# Altium PCB Asfaloth_L2_AVI_ver1.1.PcbDoc (part 1 of 2)
Units mil, origin at the board's own origin, x right, y up, seen from the top; angles counter-clockwise.
Board outline 4135 x 4330.71 mil, 2 copper layers (Top Layer, Bottom Layer); 82 components, 201 nets, 508 pads, 1168 vias.
Unrouted connection lines stored in the file: 2.
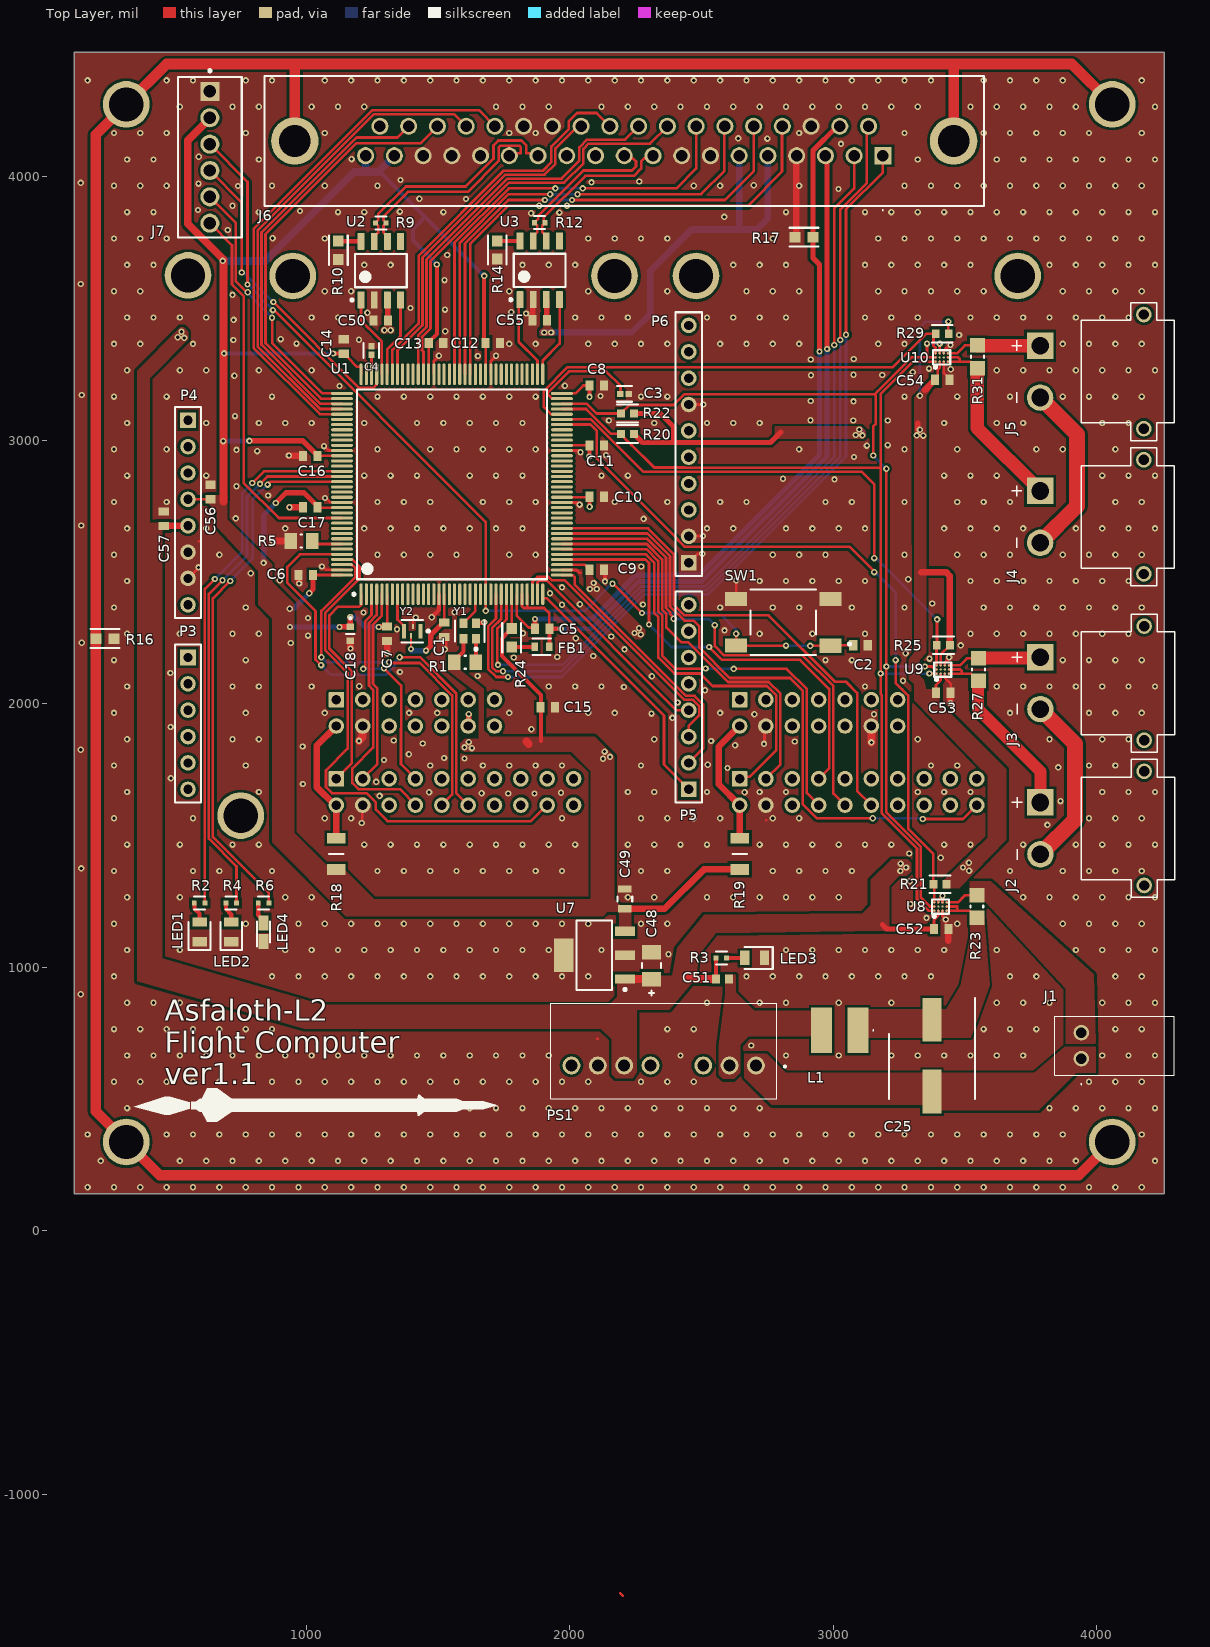
[diagram p0: Top Layer view]
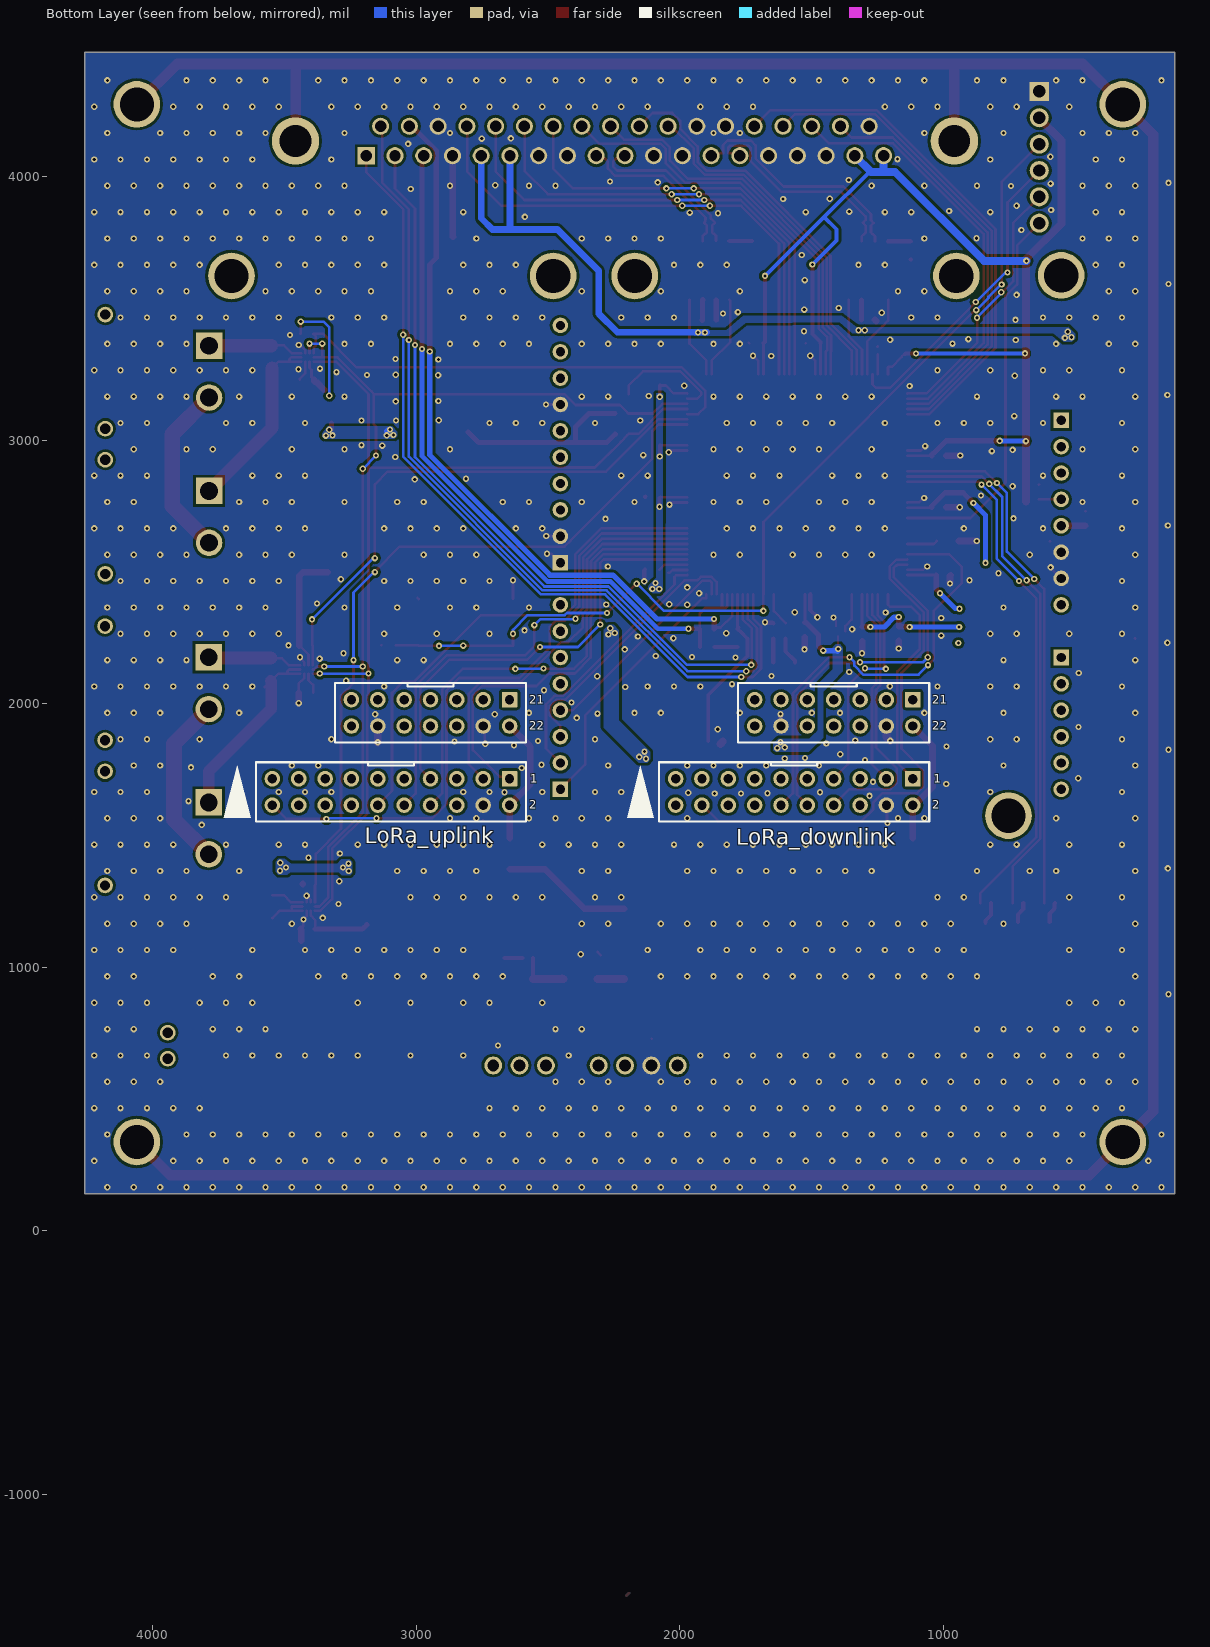
[diagram p1: Bottom Layer view, seen from below]
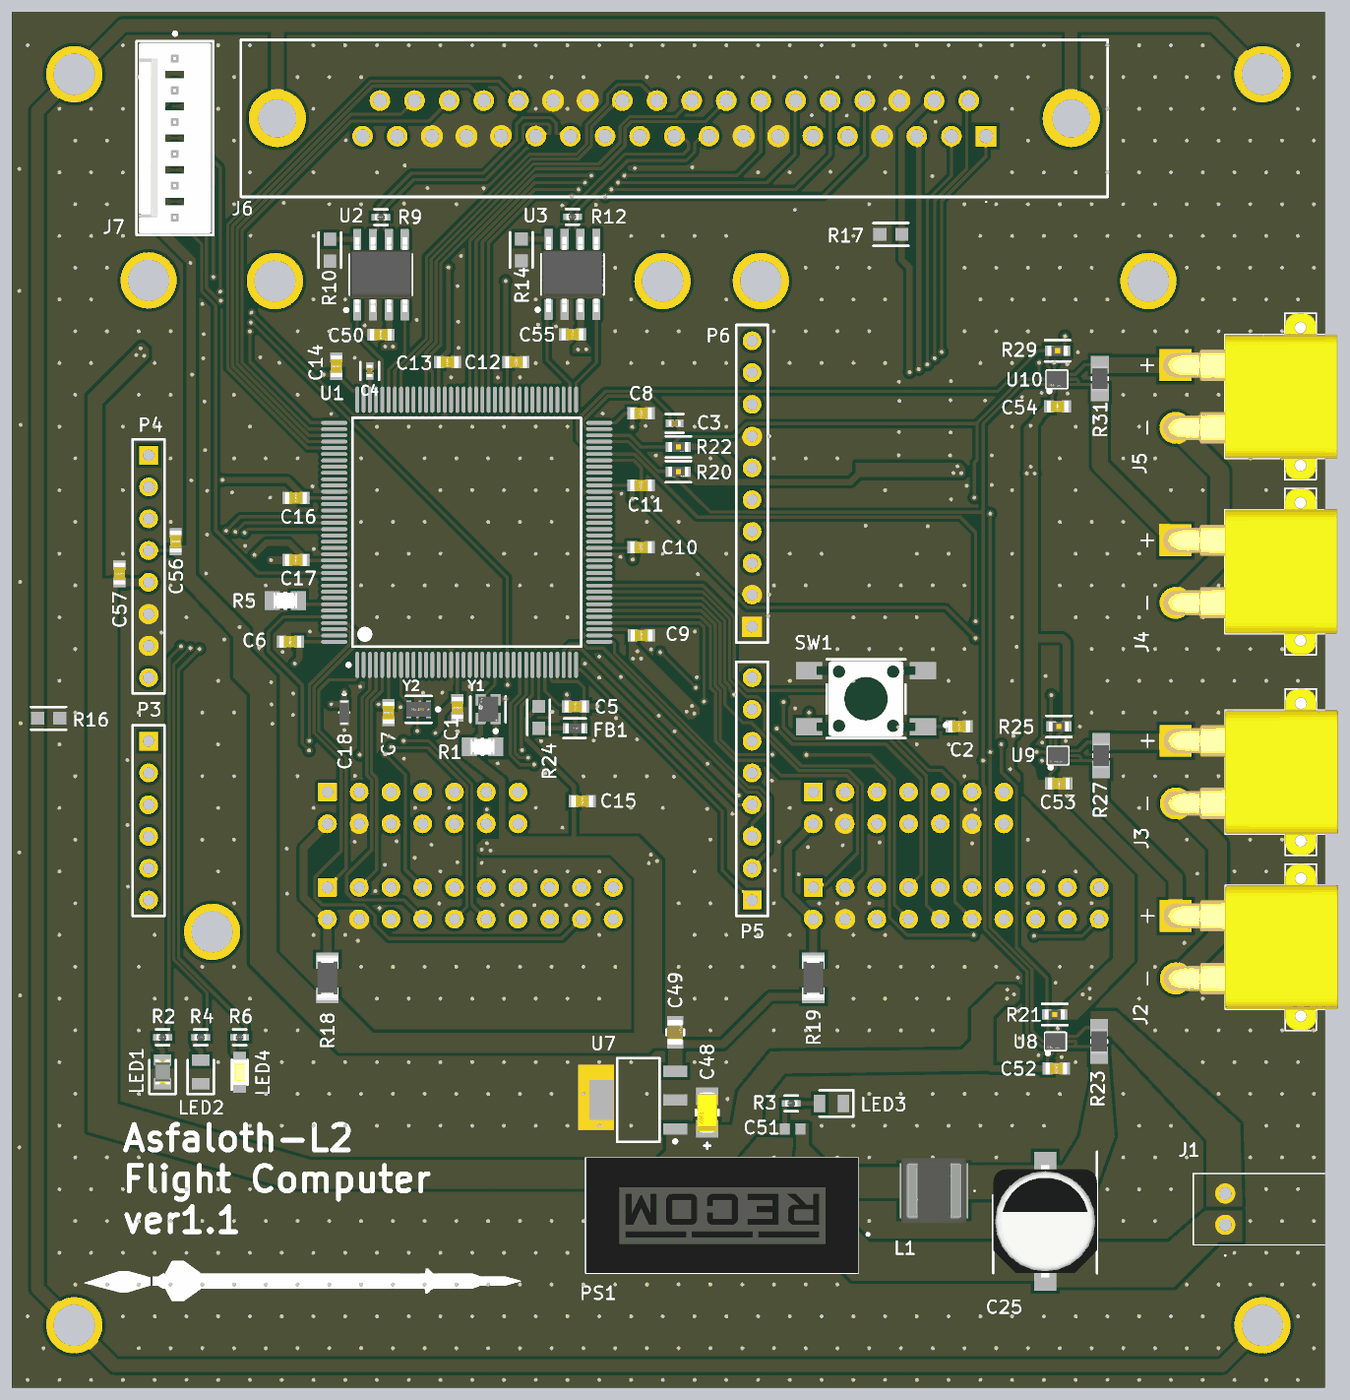
[diagram p3: 3D render of the assembled board from above, using the file's embedded part models]

## Layer stack, top to bottom
Top Solder: solder mask 0.4, Solder Resist, Dk 3.5
Top Layer: signal copper 1.4
Dielectric 1: dielectric 12.6, FR-4, Dk 4.8
Bottom Layer: signal copper 1.4
Bottom Solder: solder mask 0.4, Solder Resist, Dk 3.5

## Board outline
121,140 121,4470.71 4256,4470.71 4256,140

## Design rules (kind name [scope] priority, off if disabled: settings)
Clearance [All] p1: gap=5 ignorepadtopadclearanceinfootprint=FALSE except(10: Arc-Fill Arc-Poly Arc-Region Track-Fill Track-Poly Track-Region SMDPad-Fill SMDPad-Poly SMDPad-Region THPad-Fill THPad-Poly THPad-Region Via-Fill Via-Poly Via-Region Fill-Fill Fill-Poly Fill-Region Poly-Poly Poly-Region Region-Region)
DiffPairsRouting [All] p1: maxlimit=10 minlimit=10 mostfreqgap=10 toplayer_minwidth=10 toplayer_maxwidth=15 toplayer_prefwidth=15 bottomlayer_minwidth=10 bottomlayer_maxwidth=15 bottomlayer_prefwidth=15 maxuncoupledlength=500
PlaneClearance [All] p1: clearance=8
PlaneConnect [All] p1: planeconnectstyle=Direct reliefexpansion=20 reliefentries=4 reliefconductorwidth=10 reliefairgap=10
PolygonConnect PolygonConnect_1 [All vs InNetClass('PWR')] p1: connectstyle=Direct reliefconductorwidth=10 reliefentries=4 polygonreliefangle="90 Angle" airgapwidth=10
PolygonConnect [All] p2: thpad.connectstyle=Relief thpad.reliefconductorwidth=10 thpad.reliefentries=4 thpad.polygonreliefangle="90 Angle" thpad.airgapwidth=10 smdpad.connectstyle=Direct smdpad.reliefconductorwidth=10 smdpad.reliefentries=4 smdpad.polygonreliefangle="90 Angle" smdpad.airgapwidth=10 via.connectstyle=Direct via.reliefconductorwidth=10 via.reliefentries=4 via.polygonreliefangle="90 Angle" via.airgapwidth=10
RoutingVias [All] p1: holewidth=12 width=24 viastyle="Through Hole" minholewidth=12 minwidth=24 maxholewidth=12 maxwidth=24
SolderMaskExpansion Via [All] p1: expansion=4 istentingtop=TRUE useseparateexpansions=TRUE expansionbottom=4 istentingbottom=TRUE
Width PWR [InNetClass('PWR')] p1: maxlimit=60 minlimit=8 preferedwidth=15 minimp=50.000000 maximp=50.000000 favimp=50.000000
Width [All] p2: maxlimit=16 minlimit=6 preferedwidth=10
27 further rules are at their usual default settings.

## Classes and differential pairs
net class PWR: 3V3_VCC 5V_VCC 7V4_GND 7V4_VCC 14V8_GND 14V8_VCC 25V9_GND 25V9_VCC AGND AVDD Chassis_GND GND IN-_PM1 IN-_PM2 IN-_PM3 VDD_ANA VDD_FEM VDD_RFS VIN_DCDC
component class U_LoRa_uplink: LoRa_uplink
component class U_LoRa_downlink: LoRa_downlink
channel class SX1276_e268v01a: U_LoRa_downlink U_LoRa_uplink
differential pair CAN_Motor: +CAN_Motor_P -CAN_Motor_N
differential pair CAN_EGSE: +CAN_EGSE_P -CAN_EGSE_N

## Components (designator, comment, footprint, x,y, rotation, side; value= is the part's Value field where it differs from the comment)
C1 "0.1uF" CAPC1608X87N#1 1524.44,2280 r270 top
C2 "0.1uF" CAPC1608X87N#2 3103.87,2221.58 r0 top
C3 "2.2uF" FP-GRT155-0_2-IPC_C 2208.2,3175 r0 top
C4 "2.2uF" FP-GRT155-0_2-IPC_C 1248,3340 r90 top
C5 "0.1uF" CAPC1608X87N#1 1896,2284 r180 top
C6 "0.1uF" CAPC1608X87N#3 998.44,2487.83 r180 top
C7 "0.1uF" CAPC1608X87N#1 1307.44,2265 r270 top
C8 "0.1uF" CAPC1608X87N#3 2102.44,3207 r0 top
C9 "0.1uF" CAPC1608X87N#1 2103.44,2508 r0 top
C10 "0.1uF" CAPC1608X87N#1 2102.44,2785 r0 top
C11 "0.1uF" CAPC1608X87N#1 2102.44,2980 r0 top
C12 "0.1uF" CAPC1608X87N#3 1708.56,3368 r0 top
C13 "0.1uF" CAPC1608X87N#3 1493,3368 r0 top
C14 "0.1uF" CAPC1608X87N#3 1143,3355 r90 top
C15 "0.1uF" CAPC1608X87N#1 1917,1986 r0 top
C16 "0.1uF" CAPC1608X87N#3 1015.88,2940 r180 top
C17 "0.1uF" CAPC1608X87N#3 1015.88,2745 r180 top
C18 "4.7uF" GRT188 1168,2265 r270 top
C25 "10uF" CAPAE830X650N 3375,664.17 r270 top locked
C48 "4.7uF" FP-TAJA-MFG 2310.86,1006.18 r270 top
C49 "1uF" FP-GCM21B-0_15-MFG 2210,1258.94 r90 top
C50 "0.1uF" CAPC1608X87N#3 1283.56,3454 r180 top
C51 "220pF" CAPC1608X87X35LL15T15 2580,955 r180 top
C52 "0.1uF" CAPC1608X87N#3 3410,1145 r0 top
C53 "0.1uF" CAPC1608X87N#3 3418,2041.43 r0 top
C54 "0.1uF" CAPC1608X87N#3 3414,3228.64 r0 top
C55 "0.1uF" CAPC1608X87N#3 1886.56,3455 r180 top
C56 "0.1uF" CAPC1608X87N#3 637,2803 r90 top
C57 "0.1uF" CAPC1608X87N#3 460,2702 r90 top
FB1 "300Ohm 0.5A" FP-MMZ1608-0_8-MFG 1895,2215.48 r180 top
J1 "53426-0210" 534260210 3942,653 r90 top locked
J2 "XT30PW-M" AMASS_XT30PW-M 4180,1526.54 r270 top locked
J3 "XT30PW-M" AMASS_XT30PW-M 4180,2077.72 r270 top
J4 "XT30PW-M" AMASS_XT30PW-M 4179,2708.64 r270 top
J5 "XT30PW-M" AMASS_XT30PW-M 4179,3259.82 r270 top locked
J6 "L717SDCH37POL2" L717SDCH37POL2 3188.77,4079 r180 top locked
J7 "22-27-2061" FP-22-27-2061-MFG 635,4073 r270 top locked
L1 "47uH" SRR5228A 3025,760 r270 top
LED1 "LED_R" LEDC2012X80N 596,1134 r90 top
LED2 "LED_G" LEDC2012X90N 716,1134 r90 top
LED3 "LED_G" LEDC2012X90N 2702,1035 r180 top
LED4 "LED_B" LEDM2012X100N 838.65,1133.02 r90 top
LoRa_downlink "SM12xx Header" "HDR34 Header" 1115,1715 r0 bottom locked (schematic designator LoRa_uplink)
LoRa_uplink "SM12xx Header" "HDR34 Header" 2645,1715 r0 bottom locked
P3 "Header 6" HDR1X6 552,2175 r270 top locked
P4 "Header 8" HDR1X8 552,3075 r270 top locked
P5 "Header 8" HDR1X8 2452,1675 r90 top locked
P6 "Header 10" HDR1X10 2452,2535 r90 top locked
PS1 "RS6-0505S" RS60505S 2707,627 r180 top locked
R1 "10kOhm" FP-CRCW0805-e3-IPC_A 1603.31,2157 r180 top
R2 "120Ohm" FP-ERJ2RK-MFG 596,1243.02 r180 top
R3 "120Ohm" FP-ERJ2RK-MFG 2575.57,1035 r0 top
R4 "120Ohm" FP-ERJ2RK-MFG 716,1243.02 r180 top
R5 "10kOhm" FP-CRCW0805-e3-IPC_A 982.44,2617 r180 top
R6 "120Ohm" FP-ERJ2RK-MFG 838.65,1243.02 r180 top
R9 "120Ohm" FP-ERJ2RK-MFG 1283.56,3824 r0 top
R10 "0Ohm" FP-AC0603-0_55-IPC_A 1122.56,3720 r90 top
R12 "120Ohm" FP-ERJ2RK-MFG 1886.56,3825 r0 top
R14 "0Ohm" FP-AC0603-0_55-IPC_A 1725.56,3721 r90 top
R16 "0Ohm" FP-AC0603-0_55-IPC_A 237,2247 r0 top
R17 "0Ohm" FP-AC0603-0_55-IPC_A 2889,3770 r0 top
R18 "0Ohm" RESC3216X60N 1115,1430 r90 top
R19 "0Ohm" RESC3216X60N 2645,1430 r90 top
R20 "4.7kOhm" FP-KTR03-IPC_C 2220,3023 r0 top
R21 "4.7kOhm" FP-KTR03-IPC_C 3405,1315 r180 top
R22 "4.7kOhm" FP-KTR03-IPC_C 2220.13,3101 r0 top
R23 "10mOhm shunt" CSS0805FT10L0 3545,1230 r270 top
R24 "0Ohm" FP-AC0603-0_55-IPC_A 1779.98,2250 r90 top
R25 "4.7kOhm" FP-KTR03-IPC_C 3418,2221.43 r180 top
R27 "10mOhm shunt" CSS0805FT10L0 3551,2129.43 r270 top
R29 "4.7kOhm" FP-KTR03-IPC_C 3414,3403.64 r180 top
R31 "10mOhm shunt" CSS0805FT10L0 3547,3315.94 r270 top
SW1 "FSM2JSMAA" FP-FSM2JSMAA-MFG 2810.87,2308.58 r270 top
U1 "STM32F429ZIT6TR" STM-LQFP144_M 1553.6,2832.32 r90 top locked
U2 "SN65HVD1050MDREP" D0008A_M 1283.56,3643 r90 top
U3 "SN65HVD1050MDREP" D0008A_M 1886.56,3644 r90 top
U7 "MCP1826ST-3302E/DB" SOT-223-DB3_L 2093.86,1045.55 r180 top
U8 "INA231AIYFFR" FP-YFF0012-IPC_C 3407.13,1230 r90 top
U9 "INA231AIYFFR" FP-YFF0012-IPC_C 3415.87,2129.43 r90 top
U10 "INA231AIYFFR" FP-YFF0012-IPC_C 3411.87,3313.64 r90 top
Y1 "SIT8008BI-71-33S-16.000000G" FP-SiT8008-7-MFG 1621.06,2275.47 r90 top
Y2 "SIT1533AI-H4-DCC-32.768D" FP-SiT1533-H-MFG 1402.44,2275 r180 top

## Footprints (in the part's own frame and the unit in brackets; to place one, negate y for a bottom-side part, rotate by r counter-clockwise, add the part's x,y. Pads: shape width x height; smd on the part's side, far side on the other; paste and mask are expansions set on the pad)
534260210 [mm]
  round 1.5 hole 1 mask+0.05: 1(0,0) 2(2.5,0)
  silkscreen extent -2.5,-8.95 4.1,2.55
AMASS_XT30PW-M [mm]
  round 2.55 hole 1.7 mask+0.05: N(2.5,-10)
  rect 2.55x2.55 / inner round 2.55 / far side rect 2.55x2.55 hole 1.7 mask+0.05: P(-2.5,-10)
  round 1.508 hole 1 mask+0.05: S1(5.5,0) S2(-5.5,0)
  silkscreen extent -6.65,-12.75 6.65,2.95, body extent -6.65,-11 6.65,2.95, height 5
CAPAE830X650N [mm]
  rect 4.2x1.8 smd mask+0: 1(-3.45,0) 2(3.45,0)
  silkscreen extent -5.55,-4.15 4.15,4.15, body extent 0,0 0,0
CAPC1608X87N#1 [mm]
  rect 0.78x0.98 smd paste+0 mask+0: 1(-0.7,0) 2(0.7,0)
  body extent -0.87,-0.48 0.88,0.47, height 0.87
CAPC1608X87N#2 [mm]
  rect 0.78x0.98 smd: 1(-0.7,0) 2(0.7,0)
  body extent -0.87,-0.48 0.88,0.47, height 0.87
CAPC1608X87N#3 [mm]
  rect 0.78x0.98 smd mask+0: 1(-0.7,0) 2(0.7,0)
  body extent -0.87,-0.48 0.88,0.47, height 0.87
CAPC1608X87X35LL15T15 [mm] "Chip Capacitor, 2-Leads, Body 1.60x0.80mm, IPC High Density"
  rect 0.8x0.9 smd mask+0: 1(-0.625,0) 2(0.625,0)
  body extent -0.87,-0.48 0.87,0.48, height 0.87
CSS0805FT10L0 [mm]
  rect 1.4x1.44 smd mask+0: 1(-1.1,0) 2(1.1,0)
  silkscreen extent -0.1,-0.62 0.1,0.62, body extent -1.01,-0.64 1.02,0.63, height 0.3
D0008A_M [mm] "SOIC, 8-Leads, Body 5x4mm, Pitch 1.27mm, IPC Low Density"
  rrect15% 1.65x0.65 smd mask+0: 1(-2.825,1.905) 2(-2.825,0.635) 3(-2.825,-0.635) 4(-2.825,-1.905) 5(2.825,-1.905) 6(2.825,-0.635) 7(2.825,0.635) 8(2.825,1.905)
  silkscreen extent -2.95,-2.5 1.6,2.9, body extent -3,-2.45 3,2.45, height 1.63
FP-22-27-2061-MFG [mm]
  rect 1.84x1.84 hole 1.19 paste-1000 mask+0.05: 1(-6.35,0)
  round 1.84 hole 1.19 paste-1000 mask+0.05: 2(-3.81,0) 3(-1.27,0) 4(1.27,0) 5(3.81,0) 6(6.35,0)
  silkscreen extent -8.47,-3.08 7.75,3.08, body extent -7.85,-3.18 7.85,3.17, height 0.25
FP-AC0603-0_55-IPC_A [mil]
  rect 41.68x39.85 smd paste+0 mask+0: 1(-34.52,0) 2(34.52,0)
  silkscreen extent -55,-36 55,36
FP-CRCW0805-e3-IPC_A [mil]
  rect 47.5x59.38 smd paste+0 mask+0: 1(-41.37,0) 2(41.37,0)
  silkscreen extent -3,-25 3,25, body extent -85,-49 85,49, height 10
FP-ERJ2RK-MFG [mm]
  rect 0.475x0.5 smd paste+0 mask+0: 1(-0.513,0) 2(0.513,0)
  silkscreen extent -0.53,-0.62 0.53,0.62, body extent -0.85,-0.38 0.85,0.38, height 0.25
FP-FSM2JSMAA-MFG [mm]
  rect 1.38x2.1 smd paste+0 mask+0: 1(2.25,4.55) 2(2.24,-4.55) 3(-2.24,4.55) 4(-2.24,-4.55)
  silkscreen extent -3.15,-3.15 3.15,6.5, body extent -3.25,-5.7 3.25,5.7, height 0.25
FP-GCM21B-0_15-MFG [mm]
  rect 0.7x1.3 smd paste+0 mask+0: 1(-0.95,0) 2(0.95,0)
  silkscreen extent -0.22,-0.7 0.22,0.7, body extent -1.4,-0.8 1.4,0.8, height 0.25
FP-GRT155-0_2-IPC_C [mil]
  rect 24.73x23.87 smd paste+0 mask+0: 1(-15.32,0) 2(15.31,0)
  silkscreen extent -28,-30 28,30, body extent -32,-18 32,18, height 10
FP-KTR03-IPC_C [mil]
  rect 29.85x31.97 smd paste+0 mask+0: 1(-24.68,0) 2(24.68,0)
  silkscreen extent -40,-33 40,33, body extent -44,-22 44,22, height 10
FP-MMZ1608-0_8-MFG [mm]
  rect 0.6x0.8 smd paste+0 mask+0: 1(-0.7,0) 2(0.7,0)
  silkscreen extent -0.85,-0.79 0.92,0.77, body extent -1.1,-0.58 1.1,0.58, height 0.25
FP-SiT1533-H-MFG [mm]
  rect 0.4x1.4 smd paste+0 mask+0: 1(-0.8,0) 3(0.8,0)
  rect 0.2x0.5 smd paste+0 mask+0: 2(-0.1,-0.45) 4(0.1,0.45)
  silkscreen extent -1.68,-1.07 1.02,1.07, body extent -1.12,-0.8 1.12,0.8, height 0.25
FP-SiT8008-7-MFG [mm]
  rect 0.9x0.8 smd paste+0 mask+0: 1(-0.75,-0.6) 2(0.75,-0.6) 3(0.75,0.6) 4(-0.75,0.6)
  silkscreen extent -1.87,-1.41 1.03,1.42, body extent -1.3,-1.1 1.3,1.1, height 0.25
FP-TAJA-MFG [mm]
  rect 1.4x1.8 smd paste+0 mask+0: 1(-1.3,0) 2(1.3,0)
  silkscreen extent -0.23,-0.9 2.9,0.9, body extent -2.1,-1 2.1,1, height 0.25
FP-YFF0012-IPC_C [mm]
  round 0.212 smd paste+0 mask+0: A1(-0.4,0.6) A2(0,0.6) A3(0.4,0.6) B1(-0.4,0.2) B2(0,0.2) B3(0.4,0.2) C1(-0.4,-0.2) C2(0,-0.2) C3(0.4,-0.2) D1(-0.4,-0.6) D2(0,-0.6) D3(0.4,-0.6)
  silkscreen extent -1.06,-0.82 0.69,0.82, body extent -0.79,-0.92 0.79,0.92, height 0.25
GRT188 [mm]
  rect 0.65x0.7 smd mask+0: 1(-0.675,0) 2(0.675,0)
  silkscreen extent -1.6,-0.4 0,0.4, body extent -0.93,-0.4 0.93,0.4, height 0.9
HDR1X6 [mm] "Connector; Header; 6 Position"
  rect 1.5x1.5 hole 0.9 mask+0.05: 1(0,0)
  round 1.5 hole 0.9 mask+0.05: 2(2.54,0) 3(5.08,0) 4(7.62,0) 5(10.16,0) 6(12.7,0)
  silkscreen extent -1.27,-1.27 13.97,1.27
HDR1X8 [mm] "Connector; Header; 8 Position"
  rect 1.5x1.5 hole 0.9 mask+0.05: 1(0,0)
  round 1.5 hole 0.9 mask+0.05: 2(2.54,0) 3(5.08,0) 4(7.62,0) 5(10.16,0) 6(12.7,0) 7(15.24,0) 8(17.78,0)
  silkscreen extent -1.27,-1.27 19.05,1.27
HDR1X10 [mm] "Connector; Header; 10 Position"
  rect 1.5x1.5 hole 0.9 mask+0.05: 1(0,0)
  round 1.5 hole 0.9 mask+0.05: 2(2.54,0) 3(5.08,0) 4(7.62,0) 5(10.16,0) 6(12.7,0) 7(15.24,0) 8(17.78,0) 9(20.32,0) 10(22.86,0)
  silkscreen extent -1.27,-1.27 24.13,1.27
"HDR34 Header" [mm] "Connector; Header; 34 Position - SM12xx Header"
  rrect10% 1.5x1.5 hole 0.9 mask+0.05: 1(0,0) 21(0,-7.62)
  round 1.5 hole 0.9 mask+0.05: 2(0,2.54) 3(2.54,0) 4(2.54,2.54) 5(5.08,0) 6(5.08,2.54) 7(7.62,0) 8(7.62,2.54) 9(10.16,0) 10(10.16,2.54) 11(12.7,0) 12(12.7,2.54) 13(15.24,0) 14(15.24,2.54) 15(17.78,0) 16(17.78,2.54) 17(20.32,0) 18(20.32,2.54) 19(22.86,0) 20(22.86,2.54) 22(0,-5.08) 23(2.54,-7.62) 24(2.54,-5.08) 25(5.08,-7.62) 26(5.08,-5.08) 27(7.62,-7.62) 28(7.62,-5.08) 29(10.16,-7.62) 30(10.16,-5.08) 31(12.7,-7.62) 32(12.7,-5.08) 33(15.24,-7.62) 34(15.24,-5.08)
  silkscreen extent -1.59,-9.21 27.53,4.13
L717SDCH37POL2 [mm]
  rect 1.65x1.65 hole 1.1 mask+0.05: 1(0,0)
  round 1.65 hole 1.1 mask+0.05: 2(2.77,0) 3(5.54,0) 4(8.31,0) 5(11.08,0) 6(13.85,0) 7(16.62,0) 8(19.39,0) 9(22.16,0) 10(24.93,0) 11(27.7,0) 12(30.47,0) 13(33.24,0) 14(36.01,0) 15(38.78,0) 16(41.55,0) 17(44.32,0) 18(47.09,0) 19(49.86,0) 20(1.385,-2.84) 21(4.155,-2.84) 22(6.925,-2.84) 23(9.695,-2.84) 24(12.465,-2.84) 25(15.235,-2.84) 26(18.005,-2.84) 27(20.775,-2.84) 28(23.545,-2.84) 29(26.315,-2.84) 30(29.085,-2.84) 31(31.855,-2.84) 32(34.625,-2.84) 33(37.395,-2.84) 34(40.165,-2.84) 35(42.935,-2.84) 36(45.705,-2.84) 37(48.475,-2.84)
  round 4.575 hole 3.05 mask+0.05: MH1(-6.82,-1.42) MH2(56.68,-1.42)
  silkscreen extent -9.73,-7.7 59.59,5.3
LEDC2012X80N [mm]
  rect 0.9x1.4 smd mask+0: 1(-0.95,0) 2(0.95,0)
  silkscreen extent -1.75,-1.05 0.95,1.05, body extent -1,-0.63 1,0.63, height 0.8
LEDC2012X90N [mm]
  rect 0.9x1.4 smd mask+0: 1(-0.95,0) 2(0.95,0)
  silkscreen extent -1.75,-1.05 0.95,1.05
LEDM2012X100N [mm]
  rect 1.45x1 smd mask+0: 1(-0.9,0) 2(0.9,0)
  silkscreen extent -1.4,-0.62 1,0.62, body extent -1,-0.63 1,0.63, height 0.8
RESC3216X60N [mm]
  rect 1.05x1.8 smd mask+0: 1(-1.5,0) 2(1.5,0)
  silkscreen extent 0,-0.7 0,0.7, body extent -1.8,-0.9 1.8,0.9, height 0.61
RS60505S [mm]
  round 1.725 hole 1.15 mask+0.05: 1(0,0) 2(2.54,0) 3(5.08,0) 5(10.16,0) 6(12.7,0) 7(15.24,0) 8(17.78,0)
  silkscreen extent -2.9,-6 19.79,3.2, body extent -2.05,-6 19.75,3.2, height 10.97
SOT-223-DB3_L [mm] "SOT223, 4-Leads, Body 6.5x3.5mm, Pitch 2.3mm, Lead Span 7mm, IPC High Density"
  rect 1.9x0.9 smd mask+0: 1(-2.95,2.3) 2(-2.95,0) 3(-2.95,-2.3)
  rect 1.9x3.2 smd mask+0: 4(2.95,0)
  silkscreen extent -3.08,-3.35 1.7,3.42, body extent -1.85,-3.35 1.85,3.35, height 1.8
SRR5228A [mm]
  rect 4.4x2 smd mask+0: 1(0,1.75) 2(0,-1.75)
  silkscreen extent -0.05,3.2 0.05,3.3, body extent -2.6,-2.6 2.6,2.6, height 3.2
STM-LQFP144_M [mm] "Thin QFP, 144-Leads, Body 20x20mm, Pitch 0.5mm, IPC Low Density"
  oval 2.1x0.3 smd mask+0: 1(-10.6,8.75) 2(-10.6,8.25) 3(-10.6,7.75) 4(-10.6,7.25) 5(-10.6,6.75) 6(-10.6,6.25) 7(-10.6,5.75) 8(-10.6,5.25) 9(-10.6,4.75) 10(-10.6,4.25) 11(-10.6,3.75) 12(-10.6,3.25) 13(-10.6,2.75) 14(-10.6,2.25) 15(-10.6,1.75) 16(-10.6,1.25) 17(-10.6,0.75) 18(-10.6,0.25) 19(-10.6,-0.25) 20(-10.6,-0.75) 21(-10.6,-1.25) 22(-10.6,-1.75) 23(-10.6,-2.25) 24(-10.6,-2.75) 25(-10.6,-3.25) 26(-10.6,-3.75) 27(-10.6,-4.25) 28(-10.6,-4.75) 29(-10.6,-5.25) 30(-10.6,-5.75) 31(-10.6,-6.25) 32(-10.6,-6.75) 33(-10.6,-7.25) 34(-10.6,-7.75) 35(-10.6,-8.25) 36(-10.6,-8.75) 73(10.6,-8.75) 74(10.6,-8.25) 75(10.6,-7.75) 76(10.6,-7.25) 77(10.6,-6.75) 78(10.6,-6.25) 79(10.6,-5.75) 80(10.6,-5.25) 81(10.6,-4.75) 82(10.6,-4.25) 83(10.6,-3.75) 84(10.6,-3.25) 85(10.6,-2.75) 86(10.6,-2.25) 87(10.6,-1.75) 88(10.6,-1.25) 89(10.6,-0.75) 90(10.6,-0.25) 91(10.6,0.25) 92(10.6,0.75) 93(10.6,1.25) 94(10.6,1.75) 95(10.6,2.25) 96(10.6,2.75) 97(10.6,3.25) 98(10.6,3.75) 99(10.6,4.25) 100(10.6,4.75) 101(10.6,5.25) 102(10.6,5.75) 103(10.6,6.25) 104(10.6,6.75) 105(10.6,7.25) 106(10.6,7.75) 107(10.6,8.25) 108(10.6,8.75)
  oval 0.3x2.1 smd mask+0: 37(-8.75,-10.6) 38(-8.25,-10.6) 39(-7.75,-10.6) 40(-7.25,-10.6) 41(-6.75,-10.6) 42(-6.25,-10.6) 43(-5.75,-10.6) 44(-5.25,-10.6) 45(-4.75,-10.6) 46(-4.25,-10.6) 47(-3.75,-10.6) 48(-3.25,-10.6) 49(-2.75,-10.6) 50(-2.25,-10.6) 51(-1.75,-10.6) 52(-1.25,-10.6) 53(-0.75,-10.6) 54(-0.25,-10.6) 55(0.25,-10.6) 56(0.75,-10.6) 57(1.25,-10.6) 58(1.75,-10.6) 59(2.25,-10.6) 60(2.75,-10.6) 61(3.25,-10.6) 62(3.75,-10.6) 63(4.25,-10.6) 64(4.75,-10.6) 65(5.25,-10.6) 66(5.75,-10.6) 67(6.25,-10.6) 68(6.75,-10.6) 69(7.25,-10.6) 70(7.75,-10.6) 71(8.25,-10.6) 72(8.75,-10.6) 109(8.75,10.6) 110(8.25,10.6) 111(7.75,10.6) 112(7.25,10.6) 113(6.75,10.6) 114(6.25,10.6) 115(5.75,10.6) 116(5.25,10.6) 117(4.75,10.6) 118(4.25,10.6) 119(3.75,10.6) 120(3.25,10.6) 121(2.75,10.6) 122(2.25,10.6) 123(1.75,10.6) 124(1.25,10.6) 125(0.75,10.6) 126(0.25,10.6) 127(-0.25,10.6) 128(-0.75,10.6) 129(-1.25,10.6) 130(-1.75,10.6) 131(-2.25,10.6) 132(-2.75,10.6) 133(-3.25,10.6) 134(-3.75,10.6) 135(-4.25,10.6) 136(-4.75,10.6) 137(-5.25,10.6) 138(-5.75,10.6) 139(-6.25,10.6) 140(-6.75,10.6) 141(-7.25,10.6) 142(-7.75,10.6) 143(-8.25,10.6) 144(-8.75,10.6)
  silkscreen extent -10.72,-9.15 9.15,9.57, body extent -10,-10 10,10, height 1.6

## Part data
C1 C2 C5 C6 C7 C8 C9 C10 C11 C12 C13 C14 C15 C16 C17 C50 C52 C53 C54 C55 C56 C57: library part C0603C104J4RECAUTO, "Capacitor", Manufacturer_Name=KEMET, Mouser Part Number=80-C0603C104J4RECAUT, Datasheet Link=https://content.kemet.com/datasheets/KEM_C1090_X7R_ESD.pdf, Height=0.87mm, Manufacturer_Part_Number=C0603C104J4RECAUTO, Mouser Price/Stock=https://www.mouser.co.uk/ProductDetail/KEMET/C0603C104J4RECAUTO?qs=MLItCLRbWswpTgrKtA5UXg%3D%3D
C3 C4: library part CMP-06035-008228-1, "Multi-Layer Ceramic Capacitor 2.2uF 10V X6S ±10% 0402 Paper T/R", Case Code (Imperial)=0402, Case Code (Metric)=1005, Dielectric=X6S, Max Operating Temperature=105°C, Min Operating Temperature=-55°C, Ratings=AEC-Q200, Tolerance=10%, Voltage Rating=10V, Capacitance=2.2uF, Case/Package=0402, Length=0.039inch, Mount="Surface Mount", Packaging="Tape and Reel", Thickness=0.022inch, Voltage Rating (DC)=10V, Width=0.02inch
C18: library part GRT188C71C475KE13D, "Capacitor", Manufacturer_Name="Murata Electronics", Mouser Part Number=81-GRT188C71C475KE13, Arrow Part Number=GRT188C71C475KE13D, Arrow Price/Stock=https://www.arrow.com/en/products/grt188c71c475ke13d/murata-manufacturing?region=nac, Datasheet Link=https://www.murata.com/en-global/products/productdetail?partno=GRT188C71C475KE13%23, Height=0.8mm, Manufacturer_Part_Number=GRT188C71C475KE13D, Mouser Price/Stock=https://www.mouser.co.uk/ProductDetail/Murata-Electronics/GRT188C71C475KE13D?qs=pUKx8fyJudC7lYX%252BQNKS7Q%3D%3D
C25: library part EEE-TG1J100P, "Capacitor Polarised", Manufacturer_Name=Panasonic, Mouser Part Number=667-EEE-TG1J100P, Arrow Part Number=EEE-TG1J100P, Arrow Price/Stock=https://www.arrow.com/en/products/eee-tg1j100p/panasonic, Datasheet Link=http://industrial.panasonic.com/cdbs/www-data/pdf/RDE0000/ABA0000C1187.pdf, Height=6.5mm, Manufacturer_Part_Number=EEE-TG1J100P, Mouser Price/Stock=https://www.mouser.co.uk/ProductDetail/Panasonic/EEE-TG1J100P?qs=aAAGLDy8P2x3htHP%2FTxLDQ%3D%3D, Supplier 1=Mouser, Supplier Part Number 1=667-EEE-TG1J100P
C48: library part CMP-2100-03687-2, "4.7uF 16V  ±10% 4Ω 1206  SMD Tantalum Capacitor", Case Code (Imperial)=1206, Case Code (Metric)=3216, Dielectric Material=Tantalum, ESR (Equivalent Series Resistance)=4R, Leakage Current=800nA, Max Operating Temperature=125°C, Min Operating Temperature=-55°C, Package Quantity=1, Tolerance=10%, Voltage=16V, Capacitance=4.7uF, Case/Package=1206, Construction=Flat, Depth=1.6mm, Dissipation Factor=6%, Features="General Purpose", Height=1.6mm, Height - Seated (Max)=0.071inch, Lead Free="Lead Free", Lead Pitch=1.1mm, Length=3.2mm, Mount="Surface Mount", Number of Pins=2, Packaging="Tape and Reel", Polarity=Polar, Radiation Hardening=No, REACH SVHC="No SVHC", RoHS Compliant=Yes, Series=TAJ, Termination=SMD/SMT, Voltage Rating=16V, Voltage Rating (DC)=16V, Width=1.6mm
C49: library part CMP-06035-047787-1, "Ceramic Capacitor for Automotive 1uF ±10% 16VDC X7R 0805 Embossed T/R", Case/Package=0805, Dielectric=X7R, Max Operating Temperature=125°C, Min Operating Temperature=-55°C, Tolerance=10%, Voltage Rating (DC)=16V, Capacitance=1uF, Depth=1.25mm, Length=2mm, Packaging="Tape and Reel"
C51: library part CMP-2006-03337-1, Manufacturer=Kemet, Part Number=C0603C221J5GACAUTO
FB1: library part CMP-08257-000454-1, "Signal Line Ferrite Bead 300Ω  @ 100MHz 500mA DCR 300mΩ SMD 0603", Case Code (Imperial)=0603, Case Code (Metric)=1608, Current Rating=500mA, DC Resistance (DCR)=300mR, Package Quantity=4000, Tolerance=25%, Case/Package=0603, Core Material=Ferrite, Depth=0.8mm, Height=0.037inch, Impedance=300R, Lead Free="Lead Free", Length=0.063inch, Max DC Current=500mA, Mount="Surface Mount", Packaging="Tape and Reel", RoHS Compliant=Yes, Series=MMZ, Width=0.031inch
J1: "Headers & Wire Housings 2.50MM 2P RA HDR FRCTN POS LOCK", Manufacturer_Name=Molex, Mouser Part Number=538-53426-0210, Datasheet Link=https://www.molex.com/pdm_docs/sd/534260210_sd.pdf, Geometry.Height=6.9mm, Manufacturer_Part_Number=53426-0210, Mouser Price/Stock=https://www.mouser.co.uk/ProductDetail/Molex/53426-0210?qs=9BfFgGvh7CeGd9pd%252BU8okg%3D%3D
J2 J3 J4 J5: "Socket; DC supply; XT30; male; PIN: 2; on PCBs; THT; Colour: yellow", Package=None, Check_prices=https://www.snapeda.com/parts/XT30PW-M/AMASS/view-part/?ref=eda, MF=AMASS, MP=XT30PW-M, SnapEDA_Link=https://www.snapeda.com/parts/XT30PW-M/AMASS/view-part/?ref=snap
J6: "Dsub, Stamped Signal 3A, Straight PCB Thru Hole, 37 Pin, Flash Gold, Bright Tin Shell+Grounding Dimples, 4-40 Rear Nut Height 5.9mm", Manufacturer_Name="Amphenol Communications Solutions", Datasheet Link=https://cdn.amphenol-cs.com/media/wysiwyg/files/drawing/l717sdxhxxpol2.pdf, Geometry.Height=12.5mm, Manufacturer_Part_Number=L717SDCH37POL2
J7: library part CMP-04776-000309-1, "CONN HEADER VERT 6POS 2.54MM", Color=Natural, Contact Resistance=10mR, Current Rating=4A, Flammability Rating="UL94 V-0", Housing Color=White, Max Operating Temperature=75°C, Max Voltage Rating (AC)=250V, Min Operating Temperature=0°C, Package Quantity=10000, Connector Type="Male Pin", Contact Material=Brass, Contact Mating Length=0.295inch, Contact Plating=Tin, Contact Type="Male Pin", Depth=5.8mm, Fastening Type=Friction, Gender=Male, Hole Diameter=1.02mm, Housing Material=Nylon, Lead Pitch=2.54mm, Length=15.24mm, Material=Nylon, Max Current Rating=4A, Mount="Through Hole", Number of Contacts=6, Number of Positions=6, Number of Rows=1, Orientation=Straight, Packaging=Bulk, Pitch=2.54mm, Radiation Hardening=No, REACH SVHC="No SVHC", Series=KK, Termination=Solder, Voltage Rating=250V, Voltage Rating (AC)=250V, Working Voltage=250V
L1: library part SRR5228A-470M, "Inductor", Manufacturer_Name=Bourns, Mouser Part Number=6521-SRR5228A-470M, Datasheet Link=https://www.bourns.com/docs/Product-Datasheets/SRR5228A.pdf, Manufacturer_Part_Number=SRR5228A-470M, Mouser Price/Stock=https://www.mouser.co.uk/ProductDetail/Bourns/SRR5228A-470M?qs=QpmGXVUTftG9kA8o879uEQ%3D%3D, Supplier 1=Mouser, Supplier Part Number 1=6521-SRR5228A-470M
LED1: library part SML-H12V8TT86C, "LED", Manufacturer_Name="ROHM Semiconductor", Mouser Part Number=755-SML-H12V8TT86C, Datasheet Link=https://www.mouser.in/ProductDetail/ROHM-Semiconductor/SML-H12V8TT86C?qs=HXFqYaX1Q2xM3o6aiCqz5g%3D%3D, Height=0.8mm, Manufacturer_Part_Number=SML-H12V8TT86C, Mouser Price/Stock=https://www.mouser.co.uk/ProductDetail/ROHM-Semiconductor/SML-H12V8TT86C?qs=HXFqYaX1Q2xM3o6aiCqz5g%3D%3D
LED2 LED3: library part SML-H12P8TT86C, "LED", Manufacturer_Name="ROHM Semiconductor", Mouser Part Number=755-SML-H12P8TT86C, Datasheet Link=https://mouser.componentsearchengine.com/Datasheets/2/SML-H12P8TT86C.pdf, Height=0.9mm, Manufacturer_Part_Number=SML-H12P8TT86C, Mouser Price/Stock=https://www.mouser.co.uk/ProductDetail/ROHM-Semiconductor/SML-H12P8TT86C?qs=HXFqYaX1Q2xINkpk%2F8IQZg%3D%3D
LED4: library part SMLMN2BCTT86C, "LED", Manufacturer_Name="ROHM Semiconductor", Mouser Part Number=755-SMLMN2BCTT86C, Arrow Part Number=SMLMN2BCTT86C, Arrow Price/Stock=https://www.arrow.com/en/products/smlmn2bctt86c/rohm-semiconductor, Datasheet Link=https://fscdn.rohm.com/en/products/databook/datasheet/opto/led/chip_mono/smlmn2bctt86(c)-e.pdf, Height=1mm, Manufacturer_Part_Number=SMLMN2BCTT86C, Mouser Price/Stock=https://www.mouser.co.uk/ProductDetail/ROHM-Semiconductor/SMLMN2BCTT86C?qs=EAJhGnHnT02MwYNfU4gt9w%3D%3D
LoRa_downlink LoRa_uplink: "SM12xx Header; 34pins: 2x10pins + 2x7pins", Supplier Part Number 1=649-68602-120HLF, LatestRevisionDate=24.8.2012, LatestRevisionNote="Re-released for DXP Platform.", Publisher="Altium Limited", Supplier 1=Mouser, Supplier 2=Mouser, Supplier Part Number 2=649-67997-114HLF
P3: "Header, 6-Pin", LatestRevisionDate=17-Jul-2002, LatestRevisionNote="Re-released for DXP Platform.", Publisher="Altium Limited"
P4 P5: "Header, 8-Pin", LatestRevisionDate=17-Jul-2002, LatestRevisionNote="Re-released for DXP Platform.", Publisher="Altium Limited"
P6: "Header, 10-Pin", LatestRevisionDate=17-Jul-2002, LatestRevisionNote="Re-released for DXP Platform.", Publisher="Altium Limited"
PS1: "Power Supply", Manufacturer_Name="RECOM Power", Mouser Part Number=919-RS6-0505S, Arrow Part Number=RS6-0505S, Arrow Price/Stock=https://www.arrow.com/en/products/rs6-0505s/recom-power?region=nac, Datasheet Link=https://www.recom-power.com/pdf/Econoline/RS6.pdf, Height=11.6mm, Manufacturer_Part_Number=RS6-0505S, Mouser Price/Stock=https://www.mouser.co.uk/ProductDetail/RECOM-Power/RS6-0505S?qs=FLBwGrBR9%252B3r5kgbzQWtZg%3D%3D, Supplier 1=Mouser, Supplier Part Number 1=919-RS6-0505S
R1 R5: library part CMP-2001-04908-2, "RES Thick Film, 10kΩ, 1%, 0.125W, 100ppm/°C, 0805", Case Code (Imperial)=0805, Case Code (Metric)=2012, Max Operating Temperature=155°C, Min Operating Temperature=-55°C, Package Quantity=5000, Power Rating=125mW, Resistance=10kR, Temperature Coefficient=100ppm/°C, Tolerance=1%, Voltage Rating=150V, Case/Package=0805, Composition="Thick Film", Contact Plating=Tin, Depth=1.25mm, Height=0.45mm, Lead Free="Lead Free", Length=2mm, Military Standard=Not, Packaging="Tape and Reel", Radiation Hardening=No, Termination=SMD/SMT, Voltage Rating (DC)=150V, Weight=0.000194oz, Width=1.25mm
R2 R3 R4 R6 R9 R12: library part CMP-2002-00645-2, "RES SMD 120 OHM 1% 1/10W 0402", Case Code (Imperial)=0402, Case Code (Metric)=1005, Max Operating Temperature=155°C, Max Power Dissipation=100mW, Min Operating Temperature=-55°C, Package Quantity=10000, Resistance=120R, Resistor Type="Thick Film", Temperature Coefficient=100ppm/°C, Tolerance=1%, Voltage Rating=50V, Case/Package=0402, Contact Plating=Tin, Depth=0.5mm, Features="Automotive AEC-Q200", Height=0.35mm, Lead Free="Lead Free", Length=1mm, Military Standard=Not, Mount="Surface Mount", Number of Pins=2, Number of Terminations=2, Packaging="Cut Tape", Power Rating=100mW, Radiation Hardening=No, REACH SVHC="No SVHC", RoHS Compliant=Yes, Series=ERJ-2Rx, Technology="THICK FILM", Termination=SMD/SMT, Voltage Rating (DC)=50V, Weight=0.000388oz, Width=0.5mm
R10 R14 R16 R17 R24: library part CMP-2000-04815-2, "RES SMD 0 OHM JUMPER 1/10W 0603", Case Code (Imperial)=0603, Case Code (Metric)=1608, Max Operating Temperature=155°C, Max Power Dissipation=100mW, Min Operating Temperature=-55°C, Package Quantity=1, Resistance=0R, Resistor Type="Thick Film", Temperature Coefficient=200ppm/°C, Tolerance=1%, Voltage Rating=50V, Case/Package=0603, Features="Moisture Resistant", Height=0.022inch, Lead Free="Lead Free", Length=0.063inch, Number of Terminations=2, Packaging="Tape and Reel", Power Rating=100mW, Series=AC, Size Code=0603, Termination=SMD/SMT, Width=0.031inch
R18 R19: library part RCA12060000ZSEA, "Resistor", Manufacturer_Name=Vishay, Mouser Part Number=71-RCA12060000ZSEA, Arrow Part Number=RCA12060000ZSEA, Arrow Price/Stock=https://www.arrow.com/en/products/rca12060000zsea/vishay?region=nac, Datasheet Link=https://www.mouser.in/datasheet/2/427/rcae3-1761931.pdf, Height=0.6mm, Manufacturer_Part_Number=RCA12060000ZSEA, Mouser Price/Stock=https://www.mouser.co.uk/ProductDetail/Vishay-Draloric/RCA12060000ZSEA?qs=4%252Ber4tcBTOgzMfDdqtZgmA%3D%3D
R20 R21 R22 R25 R29: library part CMP-08839-030274-1, "Res Thick Film 0603 4.7kΩ 5% 0.1W ±200ppm/°C Automotive Paper T/R", Case/Package=0603, Max Operating Temperature=155°C, Max Power Dissipation=100mW, Min Operating Temperature=-55°C, Package Quantity=5000, Resistance=4.7kR, Resistor Type="Thick Film", Temperature Coefficient=200ppm/°C, Tolerance=5%, Height=0.022inch, Length=0.063inch, Number of Terminations=2, Packaging="Tape and Reel", RoHS Compliant=Yes, Series=KTR03, Width=0.031inch
R23 R27 R31: library part CSS0805FT10L0, "Resistor", Manufacturer_Name="Stackpole Electronics", Mouser Part Number=708-CSS0805FT10L0, Datasheet Link=https://cs.seielect.com/catalog/SEI-CSS_CSSH.PDF, Height=0.65mm, Manufacturer_Part_Number=CSS0805FT10L0, Mouser Price/Stock=https://www.mouser.co.uk/ProductDetail/SEI-Stackpole/CSS0805FT10L0?qs=IPgv5n7u5QYApC%252BwHqTVbQ%3D%3D
SW1: library part CMP-03402-000003-1, "SWITCH TACTILE SPST-NO 0.05A 24V", Contact Current Rating=50mA, Contact Resistance=100mΩ, Manufacturer="TE Connectivity", Operating Force=260gf, Package=0, Temperature="-35°C to +85°C", Temperature Range High=+85°C, Temperature Range Low=-35°C, Voltage Rating Dc=24V, Automotive=No, Category=Switch, ComponentLink2Description=Datasheet, ComponentLink2URL=https://www.te.com/commerce/DocumentDelivery/DDEController?Action=showdoc&DocId=Customer+Drawing%7F2-1437565-7%7FV%7Fpdf%7FEnglish%7FENG_CD_2-1437565-7_V.pdf%7F2-1437565-8, Device Class L1=Electromechanical, Device Class L2=Switches, Device Class L3="Pushbutton Switches", Digikey Description="SWITCH TACTILE SPST-NO 0.05A 24V", Electromechanical Life=100000Cycles, Height=4.59mm, Lead Free=Yes, Manufacturer Part Number=FSM2JSMAA, Mount="Surface Mount", Mouser Description="Tactile Switches TACTILE 260G FORCE S", Octopart=https://octopart.com/fsm2jsmaa-te+connectivity-41720620, RoHS=TRUE, Standoff Height=0.05mm, Throw Configuration=SPST-NO
U1: library part CMP-0243-00201-1, "ARM Cortex-M4 32-bit MCU+FPU, 2048 KB Flash, 256 KB Internal RAM, 114 I/Os, 144-Pin LQFP, -40 to 85 degC, Tape and Reel", I/Os (High Current)=114, Operating Frequency(F) (Processor speed) (MHz)=180, Package Description=LQFP144, Package Reference="144-Pin Low Profile Quad Flat Package, Body 20 x 20 mm, Pitch 0.5 mm", Supply Voltage(Vcc) min (V)=1.7, ComponentLink1Description="Manufacturer URL", ComponentLink1URL=http://www.st.com/, ComponentLink2Description=Datasheet, ComponentLink2URL=http://www.st.com/st-web-ui/static/active/en/resource/technical/document/datasheet/DM00071990.pdf, Core="ARM Cortex-M4", D/A Converter=2, DatasheetVersion="Rev. 7", FLASH Size (Prog) (kB)=2048, Internal RAM Size (kB)=256, Mounting Technology="Surface Mount", Packing="Tape and Reel"
U2 U3: library part CMP-0315-00066-2, "Enhanced Product Emc Optimized Can Transceiver, 70 mA, -55 to 125 degC, 8-pin SOIC (D), Green (RoHS & no Sb/Br)", Drivers Per Package=1, Manufacturer="Texas Instruments", Rating="HiRel Enhanced Product", Code_JEDEC=MS-012AA, ComponentLink1Description=Datasheet, ComponentLink1URL=http://www.ti.com/general/docs/lit/getliterature.tsp?genericPartNumber=SN65HVD1050-EP&fileType=pdf, DatasheetVersion=SLLS772A, Eco-Plan="Green (RoHS & no Sb/Br)", ICC(Max)(mA)="10, 70, 10", Isolated=No, Mounting Technology="Surface Mount", PackageDescription="8-Pin Plastic Small Outline Integrated Circuit, 4.9 x 3.9 mm, Pitch 1.27 mm Pitch", PackageReference=D0008A, PackageVersion="revM, Jun-2011", PartNumber=SN65HVD1050MDREP, Receivers Per Package=1, SubFamily=CAN
U7: library part CMP-0136-00497-1, "1000 mA, Low Voltage, Low Quiescent Current LDO Regulator, 3-Pin SOT-223, Extended Temperature, Tape and Reel", DatasheetVersion="revA, Aug-2007", PackageDescription="3-Lead Plastic Small Outline Transistor (DB) [SOT-223]", PackageReference=SOT-223-DB3, PackageVersion="revBB, Aug-2009"
U8 U9 U10: library part CMP-04910-000108-1, "IC CURRENT MONITOR 100DB 12DSBGA", Max Operating Temperature=125°C, Max Supply Voltage=5.5V, Min Operating Temperature=-40°C, Min Supply Voltage=2.7V, Nominal Supply Current=330uA, Package Quantity=3000, Accuracy=0.5%, Lead Free="Lead Free", Mount="Surface Mount", Number of Pins=12, Packaging="Tape and Reel", Radiation Hardening=No, RoHS Compliant=Yes
Y1: library part CMP-25159-264800-1, "MEMS OSC XO 16.0000MHZ H/LV-CMOS", Case/Package=SMD/SMT, Frequency=16MHz, Frequency Stability=20ppm, Max Operating Temperature=85°C, Max Supply Current=4.5mA, Min Operating Temperature=-40°C, Mount="Surface Mount", Packaging="Cut Tape", RoHS Compliant=Yes, Series=SIT8008B
Y2: library part CMP-25159-260514-1, "MEMS OSC XO 32.7680KHZ LVCMOS", Case/Package=SMD/SMT, Frequency=32.768kHz, Frequency Stability=100ppm, Max Operating Temperature=85°C, Max Supply Current=1.4uA, Min Operating Temperature=-40°C, Mount="Surface Mount", Packaging="Cut Tape", RoHS Compliant=Yes, Series=SiT1533

## Free pads (board coordinates)
  round 177.17 hole 129.92 mask+1.97: ""(317.83,4273.86) ""(317.85,336.85) ""(552,3625) ""(752,1575) ""(949.65,3622.87) ""(2170.12,3622.87) ""(2479.65,3622.87) ""(3700.12,3622.87) ""(4059.13,4273.86) ""(4059.15,336.85)

## Via types
v1: diameter 24, hole 12, Top Layer to Bottom Layer, tented both sides, 1168 vias

## Nets (pads, with @x,y where several pads share a name; then routed paths per layer and width w, separated by ;. In a path a pad name is that pad's centre, name@x,y a point inside that pad or via, vN(x,y) a via of type N, cw(c..) or ccw(c..) an arc to the next point about the centre after c; other vN are vias at no path point)
3V3_VCC: C1.1 C6.1 C7.1 C8.1 C9.1 C10.1 C11.1 C12.1 C13.1 C14.1 C15.1 C16.1 C17.1 C18.1 C49.1 C56.1 J6.18 J6.19 J7.2 P4.4 R1.2 R18.1 R19.1 R24.2 U1.6 U1.17 U1.30 U1.39 U1.52 U1.62 U1.72 U1.84 U1.95 U1.108 U1.121 U1.131 U1.144 U7.3 Y1.4 Y2.4 | length 8693.1
  Top Layer w8: v1(1398,2207) 1398.5,2207.5 Y2.4@1398.5,2257.28
  Top Layer w10: P4.4@552,2775 552.22,2775.22 C56.1@636.78,2775.22 ; C6.1@1026,2487.83 U1.144@1136.28,2487.83 ; C17.1@1043.44,2745 1044.7,2743.74 U1.131@1136.28,2743.74 ; C16.1@1043.44,2940 1044.03,2940.59 U1.121@1136.28,2940.59 ; C14.1@1143,3327.44 1146.94,3327.44 1157.29,3317.09 1157.29,3314.71 1194.06,3277.94 1208.27,3277.94 1209.11,3277.1 U1.108@1209.11,3249.65 ; U1.6@1307.54,2415 1307.54,2292.65 C7.1@1307.44,2292.56 C7.1@1311.38,2292.56 ; U1.95@1465.02,3249.65 1465.02,3367.57 C13.1@1465.44,3368 ; U1.17@1524.07,2415 1524.07,2307.93 C1.1@1524.44,2307.56 ; C12.1@1681,3368 1681.55,3367.45 U1.84@1681.55,3249.65 ; R24.2@1772.98,2289.04 R24.2@1773.95,2290.02 ; R24.2@1779.98,2283.6 R24.2@1779.98,2284.52 U1.30@1779.98,2415 ; U1.39@1970.92,2527.2 1971.13,2527 2056.88,2527 C9.1@2075.88,2508 ; U1.52@1970.92,2783.11 C10.1@2072.99,2783.11 ; U1.62@1970.92,2979.96 C11.1@2074.84,2979.96 ; U1.72@1970.92,3176.81 1971.27,3177.16 2022.16,3177.16 2052,3207 C8.1@2074.88,3207
  Top Layer w15: v1(1102.56,3328.56) 1103.11,3328 1142.44,3328 C14.1@1143,3327.44 ; C13.1@1465.44,3368 1465.44,3371.94 1496,3402.5 v1(1496,3666) ; v1(1676,3623) 1676,3373 C12.1@1681,3368 ; R24.2@1779.98,2283.6 1767.55,2271.18 1766.64,2271.18 1743,2247.54 1743,2180 1891,2032 1891,1858 ; C10.1@2072.99,2783.11 2075.44,2780.66 2075.44,2747.56 v1(2076,2747) ; C11.1@2074.88,2980 2074.94,2979.94 2074.94,2938.06 v1(2075,2938) ; C8.1@2074.88,3207 2075.05,3206.83 2075.05,3164.17 v1(2075.21,3164)
  Top Layer w16: R1.2@1561.94,2157 1561.94,2162.94 1597.44,2198.44 Y1.4@1597.44,2245.94
  Top Layer w20: v1(785,2997) 988.41,2997 1036.12,2949.29 1038.09,2949.29 1043.44,2943.94 C16.1@1043.44,2940 ; v1(885,2761) 924,2800 992.38,2800 1043.44,2748.94 C17.1@1043.44,2745 ; v1(1012,2419) 1012,2420.08 1026,2434.08 C6.1@1026,2487.83 ; v1(1127,2291) 1127.29,2291.29 1167.71,2291.29 C18.1@1168,2291.58 v1(1168,2329) ; v1(1276,2291) 1276.77,2291.77 1306.65,2291.77 C7.1@1307.44,2292.56 ; v1(1455,2201) 1473,2219 1473,2260.05 1520.5,2307.56 C1.1@1524.44,2307.56
  Top Layer w25: C49.1@2210,1221.54 2360.53,1221.54 2509.95,1370.95 R19.1@2645,1370.95
  Top Layer w30: J7.2@635,4223 635,4220.58 551,4136.58 551,3821 686,3686 v1(686,2996) 686,2767.7 ; 1836,1856 1845,1847
  Bottom Layer w10: v1(686,2996) v1@686.5,2996.5 ; 1273.83,4018 1280,4018
  Bottom Layer w15: v1(689,3329) 689.22,3328.78 1102.33,3328.78 v1(1102.56,3328.56) ; 1280,4018 1451.5,3846.5 ; v1(1496,3666) 1405,3757 1405,3800 1451.5,3846.5 ; v1(1676,3623) 1675,3623 1451.5,3846.5
  Bottom Layer w20: v1@686.5,2996.5 784.5,2996.5 v1(785,2997) ; v1(839,2534) 839,2715 v1(885,2761) ; v1(938,2360) 938.77,2360.77 953.77,2360.77 v1(1012,2419) ; v1(939,2291) v1(1127,2291) ; v1(942,2230) v1@942.5,2230.5 ; v1(1168,2329) 1168.77,2328.23 1185.77,2328.23 1223,2291 v1(1276,2291) ; v1@1401,2198 1404,2201 v1(1455,2201)
  Bottom Layer w30: v1(684,3680) 845,3680 1183,4018 1225.78,4018 ; J6.19@1225.78,4079 1225.78,4018 ; J6.18@1334.83,4079 1273.83,4018 1225.78,4018
  other v1: 2127,1791 2153,1798 2133,1818 1629,1831 1601,1834 1617,1854 2270,2262 2246,2268 2263,2286 2077,2435 2103,2435 2091,2458
5V_VCC: C48.2 C50.1 C51.2 C52.1 C53.1 C54.1 C55.1 C57.1 J6.5 J6.6 P4.5 PS1.6 R3.1 R20.2 R21.1 R22.2 R25.1 R29.1 U2.3 U3.3 U7.1 U8.B1 U9.B1 U9.B3 U10.B1 | length 4437
  Top Layer w10: C52.1@3382.44,1145 3382.44,1178.44 3399.25,1195.25 U8.B1@3399.25,1214.25 ; C54.1@3386.44,3228.64 3396.79,3238.99 3396.79,3266.81 3404,3274.01 U10.B1@3404,3297.89 ; C53.1@3390.44,2041.43 3390.44,2070.75 3408,2088.31 U9.B1@3408,2113.69 ; U9.B3@3408,2145.18 3408,2185.69 R25.1@3442.68,2220.37 ; v1(3437.34,3449.34) 3437.34,3404.98 R29.1@3438.68,3403.64
  Top Layer w15: C51.2@2555.39,955 R3.1@2555.39,1035
  Top Layer w20: C50.1@1309.84,3455.28 U2.3@1309.84,3530.5 ; U3.3@1911.56,3532.78 1912.84,3531.5 1912.84,3456.28 C55.1@1914.12,3455 ; R20.2@2244.15,3022.47 2276.15,2990.47 2395,2990.47 ; R22.2@2244.81,3101 2344,3101 2395,3050 2395,2990.47 ; 2802,3030 2762.47,2990.47 2395,2990.47 ; 3187,1161 3203,1145 C52.1@3382.44,1145 ; v1@3321,3040 3321,3065
  Top Layer w25: C57.1@460,2674.44 460.28,2674.72 551.72,2674.72 P4.5@552,2675 ; 2441,955 2445,959 ; v1@3276,1378 v1(3277,1378) ; 3335,2499 3428.04,2499 3442.68,2484.36 R25.1@3442.68,2221.43 R25.1@3442.68,2220.37 ; 3348.09,3190.28 3379.65,3221.85 3383.59,3221.85 3386.44,3224.7 C54.1@3386.44,3228.64 ; R21.1@3429.68,1315 R21.1@3429.68,1316.06
  Top Layer w30: U7.1@2210,955 C48.2@2310.86,955 ; 2441,955 C51.2@2555.39,955
  Bottom Layer w10: v1(3329,3168) 3329,3428 3350.34,3449.34 v1(3437.34,3449.34)
  Bottom Layer w20: v1(3099,3040) 3104,3040 3110.5,3033.5
  Bottom Layer w25: v1@1896,3409 2236,3409 2306,3479 2306,3642 2463,3799 2643.5,3799 ; J6.6@2643.5,4079 2643.5,3799 ; J6.5@2752.55,4079 2752.55,3841.55 2710,3799 2643.5,3799
  other v1: 3255,1365 3516,1366 3493,1378 3256,1393 3515,1396 3342,3017 3111,3018 3317,3018 3086,3019 3329,3039 538,3388 513,3390 1904,3408 1930,3408 527,3411 1297,3417 1321,3417
7V4_GND: C25.2 J1.1 PS1.1
7V4_VCC: J1.2 R23.1 U8.D3 | length 125.7
  Top Layer w10: U8.D3@3430.75,1245.75 3473.7,1245.75 3501.26,1273.31 R23.1@3545,1273.31
14V8_GND: J2.N J3.N | length 671.4
  Top Layer w10: J2.N@3786.3,1428.11 J2.N@3786.3,1439.2
  Top Layer w60: J2.N@3786.3,1428.11 3918,1559.81 3918,1847.59 J3.N@3786.3,1979.29
14V8_VCC: J3.P R27.1 U9.D3 | length 359.6
  Top Layer w10: U9.D3@3439.5,2145.18 3481.07,2145.18 3507.89,2172 3550.26,2172 R27.1@3551,2172.74 ; J3.P@3782.9,2172.74 J3.P@3786.3,2176.14
  Top Layer w50: R27.1@3551,2172.74 J3.P@3782.9,2172.74
25V9_GND: J4.N J5.N | length 666.9
  Top Layer w60: J4.N@3785.3,2610.21 3925,2749.91 3925,3021.69 J5.N@3785.3,3161.39
25V9_VCC: J5.P R31.1 U10.D3 | length 362.6
  Top Layer w10: U10.D3@3435.5,3329.39 3470.39,3329.39 3500.24,3359.24 R31.1@3547,3359.24 R31.1@3548,3358.24
  Top Layer w50: R31.1@3548,3358.24 J5.P@3785.3,3358.24
ADC1_IN11: J6.1 U1.27 | length 3211.9
  Top Layer w10: U1.27@1720.92,2415 1720.92,2322.79 1691.05,2292.93 1691.05,2131.67 1721.73,2101 v1(1766.01,2101) ; v1(3049,3400) 3049,3876 3188.77,4015.77 J6.1@3188.77,4079
  Bottom Layer w10: v1(1766.01,2101) 1969,2101 2282.53,2414.53 2525.53,2414.53 3049,2938 v1(3049,3400)
ADC2_IN12: J6.20 U1.28 | length 3253.8
  Top Layer w10: U1.28@1740.61,2415 1740.61,2321.27 1706.05,2286.71 1706.05,2137.89 1720.94,2123 v1(1747,2123) ; v1(3027,3380) 3027,3875.21 3128,3976.21 3128,4184.57 J6.20@3134.24,4190.81
  Bottom Layer w10: v1(1747,2123) 1969.79,2123 2276.31,2429.53 2519.31,2429.53 3027,2937.21 v1(3027,3380)
ADC3_IN13: J6.2 U1.29 | length 3060.9
  Top Layer w10: v1(1728.05,2147) 1725.5,2149.55 1725.5,2284.95 1760.29,2319.74 U1.29@1760.29,2415 ; v1(3004,3360.71) 3004,3879 3079.72,3954.72 J6.2@3079.72,4079
  Bottom Layer w10: v1(1728.05,2147) 1972.57,2147 2270.1,2444.53 2513.1,2444.53 3004,2935.43 v1(3004,3360.71)
AGND: C5.2 J6.21 R17.2 U1.31 | length 2850.6
  Top Layer w10: U1.31@1799.66,2415 1799.66,2333.34 1843.94,2289.06 1863.38,2289.06 C5.2@1868.44,2284
  Top Layer w20: C5.2@1868.44,2284 1868.72,2284.28 1868.72,2320.72 v1(1869,2321) ; v1(2948,3336) 2948,3666 2923.18,3690.82 2923.18,4098.67 3015.33,4190.81 J6.21@3025.19,4190.81
  Bottom Layer w20: v1(1869,2321) 2085.76,2321 2252.29,2487.53 2492,2487.53 2948,2943.53 v1(2948,3336)
ALE_PM1: R21.2 U1.66 U8.A3 | length 2831.2
  Top Layer w10: U1.66@1970.92,3059 2079,3059 2103,3035 2103,2930 2412.47,2620.53 2412.47,2618.63 2435.63,2595.47 3062.53,2595.47 3156,2502 v1(3156,2499) ; v1(3237,2165) 3237,2078 3260.47,2054.53 3261.37,2054.53 3284.53,2031.37 3284.53,1525.9 3380.32,1430.11 R21.2@3380.32,1315 3383.5,1311.81 U8.A3@3383.5,1245.75
  Bottom Layer w10: v1(3156,2499) 3159,2499 3237,2421 v1(3237,2165)
ALE_PM2: R25.2 U1.67 U9.A3 | length 2077
  Top Layer w10: U1.67@1970.92,3078.39 2080.83,3078.39 2279.21,2880 3108,2880 3156,2832 v1(3156,2552) ; U9.A3@3392.25,2145.18 R25.2@3392.25,2221.43 ; R25.2@3393.32,2221.43 3394,2222.12 3394,2319 v1(3394.63,2319.63)
  Bottom Layer w10: v1(3156,2552) 3162,2552 3394.37,2319.63 v1(3394.63,2319.63)
ALE_PM3: R29.2 U1.68 U10.A3 | length 1799.4
  Top Layer w10: U1.68@1970.92,3098.07 1970.57,3098.42 1929.18,3098.42 1902.14,3125.46 1902.14,3187.17 1990.97,3276 3226,3276 3353.64,3403.64 R29.2@3389.32,3403.64 3389.32,3402.57 3381,3394.26 3381,3357.89 3388.25,3350.64 U10.A3@3388.25,3329.39
AVDD: C5.1 FB1.1 J6.3 U1.32 U1.33 | length 2804
  Top Layer w10: U1.32@1819.35,2415 1819.35,2368.65 1825.2,2362.8 1839.03,2362.8 ; U1.33@1839.03,2415 1839.03,2362.8 ; C5.1@1923.06,2283.5 1923.06,2342.94 1903.21,2362.8 1839.03,2362.8
  Top Layer w15: FB1.1@1922.56,2215.48 1923.06,2215.98 C5.1@1923.06,2283.5
  Top Layer w18: C5.1@1928.41,2282.5 1929.91,2284 v1(1966,2284) ; J6.3@2970.66,4079 2977,4072.66 v1(2977,3345.62)
  Bottom Layer w18: v1(1966,2284) 2082.7,2284 2262.23,2463.53 2501.94,2463.53 2977,2938.59 v1(2977,3345.62)
BOOT0_STM: R5.1 U1.138 | length 117
  Top Layer w10: R5.1@1023.81,2617 1034.87,2605.94 U1.138@1136.28,2605.94
CAN_EGSE_N: J6.9 R12.2 U3.6 | length 630.5
  Top Layer w10: U3.6@1911.56,3755.22 1911.56,3774.9 1903.76,3782.7 1902.42,3782.7 1896.56,3788.56 1896.56,3814.33 1906.74,3824.51 R12.2@1906.74,3825 1902.39,3829.35 1902.39,3834.84 1901.53,3835.7 1901.53,3843.98 2060.4,4002.86 2244.86,4002.86 2271.8,4029.8 2271.8,4057.43 2282.86,4068.48 2305.81,4068.48 J6.9@2316.33,4079
CAN_EGSE_P: J6.10 R12.1 U3.7 | length 634.6
  Top Layer w10: U3.7@1861.56,3755.22 1861.56,3774.9 1869.35,3782.7 1870.7,3782.7 1876.56,3788.56 1876.56,3814.33 1866.38,3824.51 R12.1@1866.38,3825 1866.38,3825.49 1881.53,3840.64 1881.53,3852.27 2052.12,4022.86 2236.57,4022.86 2251.8,4038.09 2251.8,4057.43 2240.75,4068.48 2217.79,4068.48 J6.10@2207.28,4079
CAN_EGSE_RX: U1.73 U3.4 | length 309.8
  Top Layer w10: U1.73@1898.09,3249.65 1898.09,3302.09 1962,3366 1962,3532.34 U3.4@1961.56,3532.78
CAN_EGSE_TX: U1.74 U3.1 | length 314.6
  Top Layer w10: U3.1@1811.56,3532.78 1807,3528.22 1807,3373 1878.4,3301.6 U1.74@1878.4,3249.65
CAN_Motor_N: J6.14 R9.2 U2.6 | length 845.3
  Top Layer w10: U2.6@1308.56,3754.22 1308.56,3773.9 1300.76,3781.7 1299.42,3781.7 1293.56,3787.56 1293.56,3813.33 1303.74,3823.51 R9.2@1303.74,3824 1303.74,3824.49 1293.56,3834.67 1293.56,3848.84 1386.98,3942.26 1613.62,3942.26 1731,4059.64 1731,4110 1738,4117 1809.14,4117 1815,4111.14 1815,4088 1780.06,4088 J6.14@1771.06,4079
CAN_Motor_P: J6.13 R9.1 U2.7 | length 912.8
  Top Layer w10: U2.7@1258.56,3754.22 1258.56,3773.9 1266.35,3781.7 1267.7,3781.7 1273.56,3787.56 1273.56,3813.33 1263.38,3823.51 R9.1@1263.38,3824 1263.38,3824.49 1273.56,3834.67 1273.56,3857.13 1378.69,3962.26 1605.34,3962.26 1711,4067.92 1711,4118.28 1729.72,4137 1817.43,4137 1835,4119.43 1835,4088 1871.11,4088 J6.13@1880.11,4079
CAN_Motor_RX: U1.103 U2.4 | length 303.3
  Top Layer w10: U1.103@1307.54,3249.65 1307.54,3343.73 1357,3393.2 1357,3394 1358.56,3395.56 U2.4@1358.56,3531.78
CAN_Motor_TX: U1.104 U2.1 | length 315.4
  Top Layer w10: U2.1@1208.56,3531.78 1208.56,3453.44 1230.65,3431.35 1230.65,3430.57 1236.5,3424.71 1237.29,3424.71 1287.85,3374.15 U1.104@1287.85,3249.65
Chassis_GND: J6.MH1 J6.MH2 pad.@317.83,4273.86 pad.@317.85,336.85 pad.@4059.13,4273.86 pad.@4059.15,336.85 R16.1 | length 12331.8
  Top Layer w40: J6.MH2@957.28,4134.91 957.28,4427 ; J6.MH1@3457.28,4134.91 3457,4135.18 3457,4427 ; pad.@4059.15,336.85 3932.3,210 444.7,210 pad.@317.85,336.85 202,452.7 202,4158.02 pad.@317.83,4273.86 470.98,4427 957.28,4427 ; pad.@4059.13,4273.86 3905.99,4427 3457,4427 ; 957.28,4427 3457,4427
CTS_IMU: P5.4 U1.35 | length 825
  Top Layer w10: U1.35@1878.4,2415 1878.4,2460.48 1884.26,2466.34 1913.28,2466.34 2404.62,1975 P5.4@2452,1975
DIO0_U_LoRa_downlink: LoRa_downlink.12 U1.140 | length 1715.9
  Top Layer w10: v1(1057,2146) 1056.89,2146 1036,2166.89 1036,2351 929,2458 929,2519 976.57,2566.57 U1.140@1136.28,2566.57 ; v1(1355,2176) 1432.89,2176 1569.53,2039.36 1569.53,1660.47 LoRa_downlink.12@1615,1615
  Bottom Layer w10: v1(1057,2146) 1093,2110 1303.11,2110 1337,2143.89 1337,2158 v1(1355,2176)
DIO0_U_LoRa_uplink: LoRa_uplink.12 U1.46 | length 1938.9
  Top Layer w10: U1.46@1970.92,2665 2297.28,2665 2396,2566.28 2396,2375.1 2436.1,2335 2755,2335 3007,2083 3049,2083 3091,2041 3091,1669 LoRa_uplink.12@3145,1615
DIO1_U_LoRa_downlink: LoRa_downlink.5
DIO1_U_LoRa_uplink: LoRa_uplink.5
DIO2_U_LoRa_downlink: LoRa_downlink.17
DIO2_U_LoRa_uplink: LoRa_uplink.17
DIO3_U_LoRa_downlink: LoRa_downlink.6
DIO3_U_LoRa_uplink: LoRa_uplink.6
DIO4_U_LoRa_downlink: LoRa_downlink.11
DIO4_U_LoRa_uplink: LoRa_uplink.11
DIO5_U_LoRa_downlink: LoRa_downlink.9
DIO5_U_LoRa_uplink: LoRa_uplink.9
FEM_ANT_SEL_U_LoRa_downlink: LoRa_downlink.16
FEM_ANT_SEL_U_LoRa_uplink: LoRa_uplink.16
FEM_CPS_U_LoRa_downlink: LoRa_downlink.18 U1.141 | length 1972
  Top Layer w10: U1.141@1136.28,2546.89 1136.62,2546.54 1176.39,2546.54 1202.86,2520.07 1202.86,2475.86 1202.61,2475.61 1202.61,2475.03 1073,2345.42 1073,2202 1158,2117 1158,1829.47 1075.47,1746.94 1075.47,1683.06 1098.06,1660.47 1229.53,1660.47 1265,1625 1265,1598 1309,1554 1852.88,1554 1913.88,1615 LoRa_downlink.18@1915,1615
FEM_CPS_U_LoRa_uplink: LoRa_uplink.18
FEM_CSD_U_LoRa_downlink: LoRa_downlink.19
FEM_CSD_U_LoRa_uplink: LoRa_uplink.19
FEM_CTX_U_LoRa_downlink: LoRa_downlink.20
FEM_CTX_U_LoRa_uplink: LoRa_uplink.20 U1.45 | length 2455.3
  Top Layer w10: U1.45@1970.92,2645.32 2295.75,2645.32 2381,2560.07 2381,2368.89 2435.36,2314.53 2469.61,2314.53 2492,2292.14 2492,2212.11 2607.11,2097 2836.79,2097 2884.53,2049.26 2884.53,1619.57 2939.1,1565 v1(3150,1565) ; v1(3340,1562) 3492,1562 LoRa_uplink.20@3545,1615
  Bottom Layer w10: v1(3150,1565) 3337,1565 v1(3340,1562)
FEM_SPARE_U_LoRa_downlink: LoRa_downlink.14
FEM_SPARE_U_LoRa_uplink: LoRa_uplink.14